# Altium PCB lab1_vodorezov_usb_rs485.PcbDoc
Units mm, origin at the board's own origin, x right, y up, seen from the top; angles counter-clockwise.
Board outline 78.05 x 34.45 mm, 4 copper layers (Top Layer, Signal Layer 1, Signal Layer 2, Bottom Layer), stack 1.522 mm thick; 31 components, 22 nets, 121 pads, 82 vias.
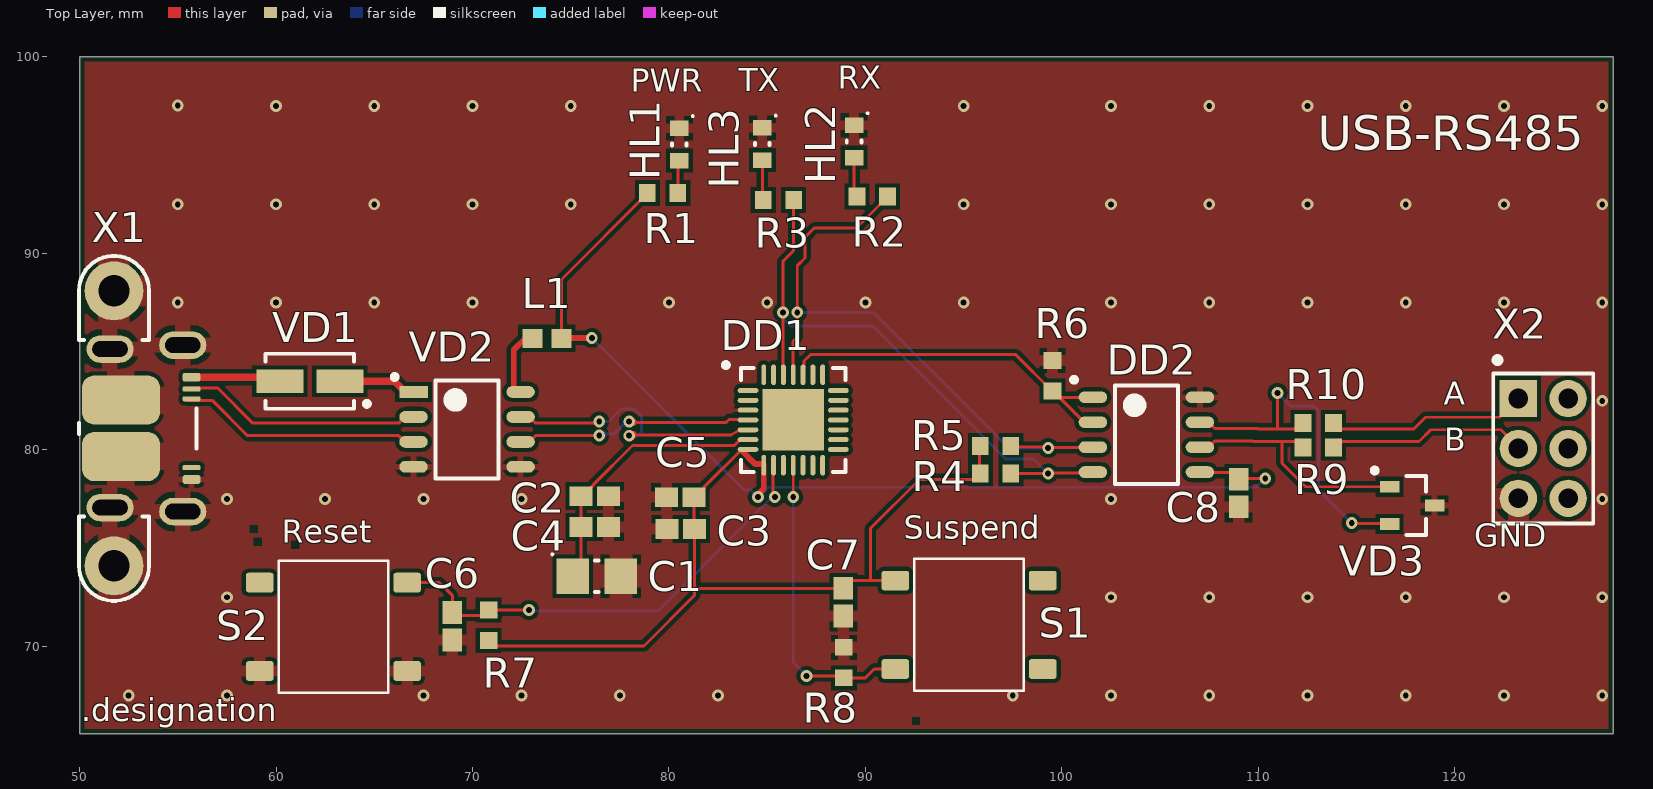
[diagram p0: Top Layer view]
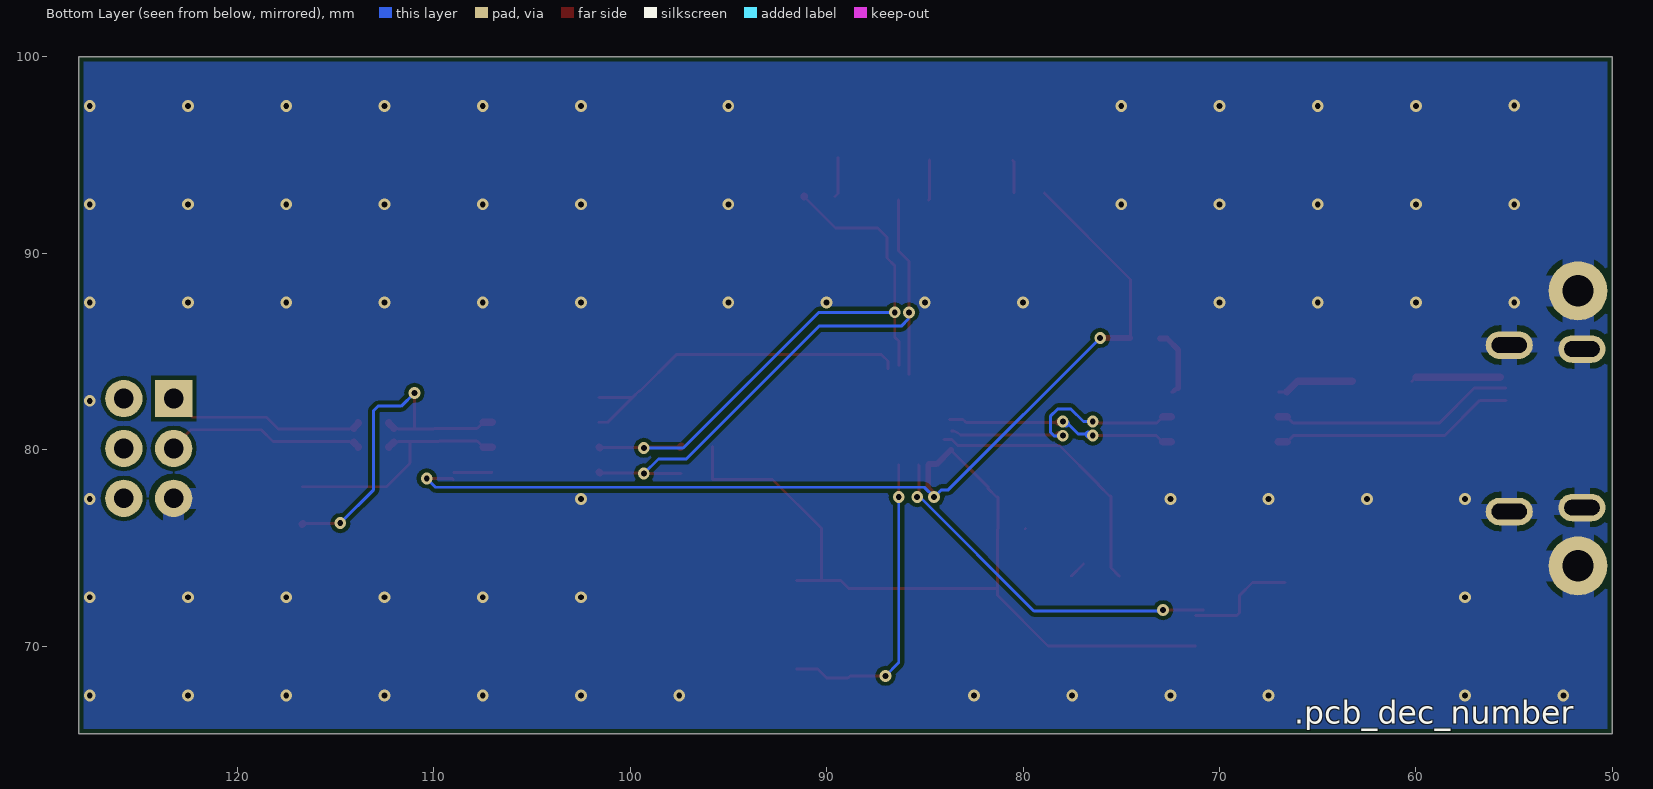
[diagram p1: Bottom Layer view, seen from below]
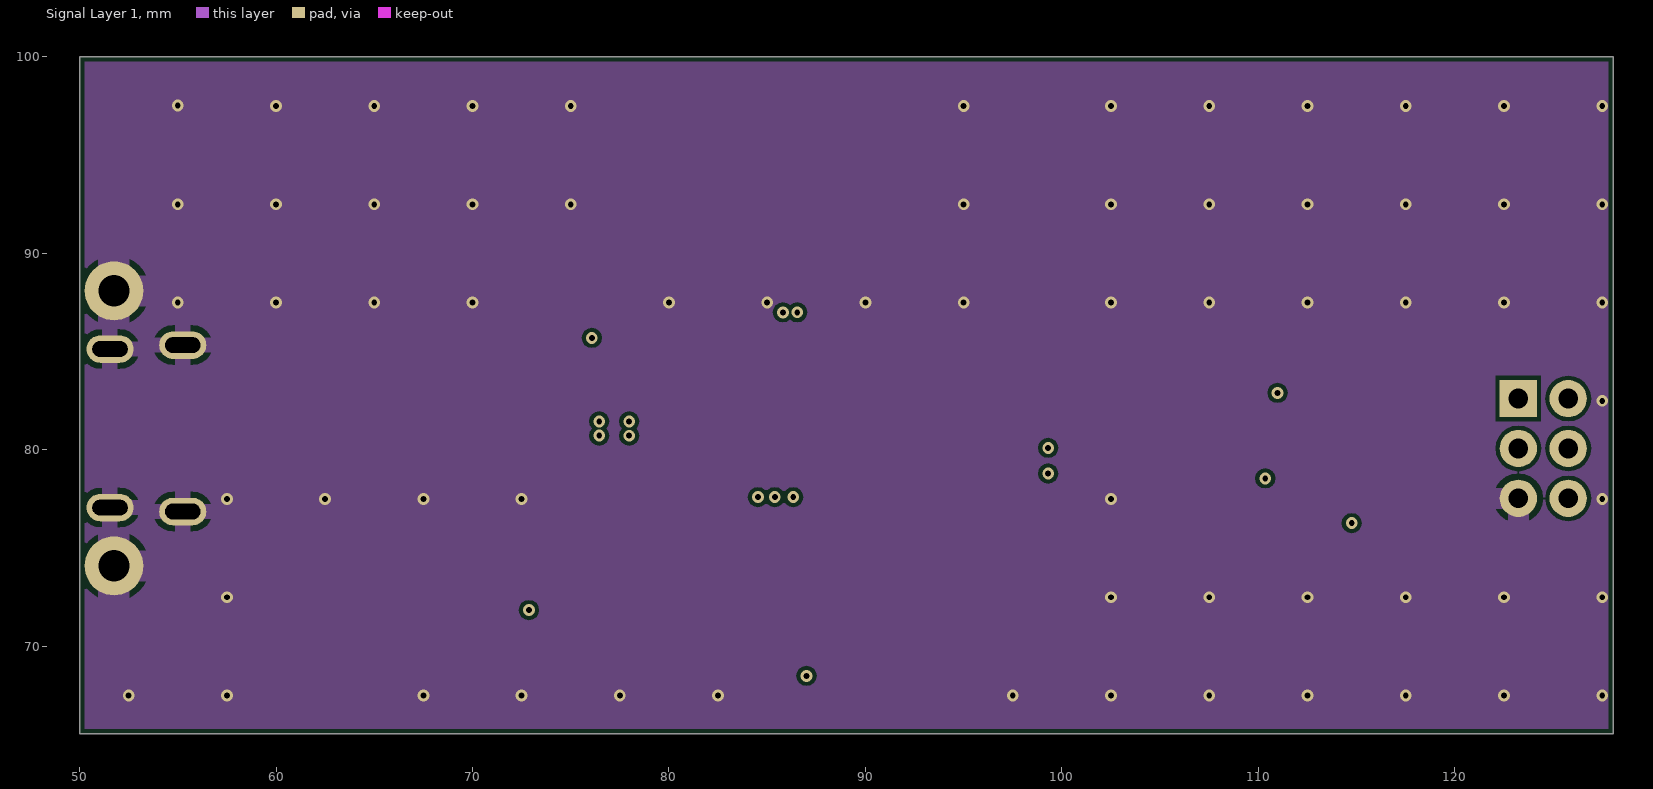
[diagram p2: Signal Layer 1]
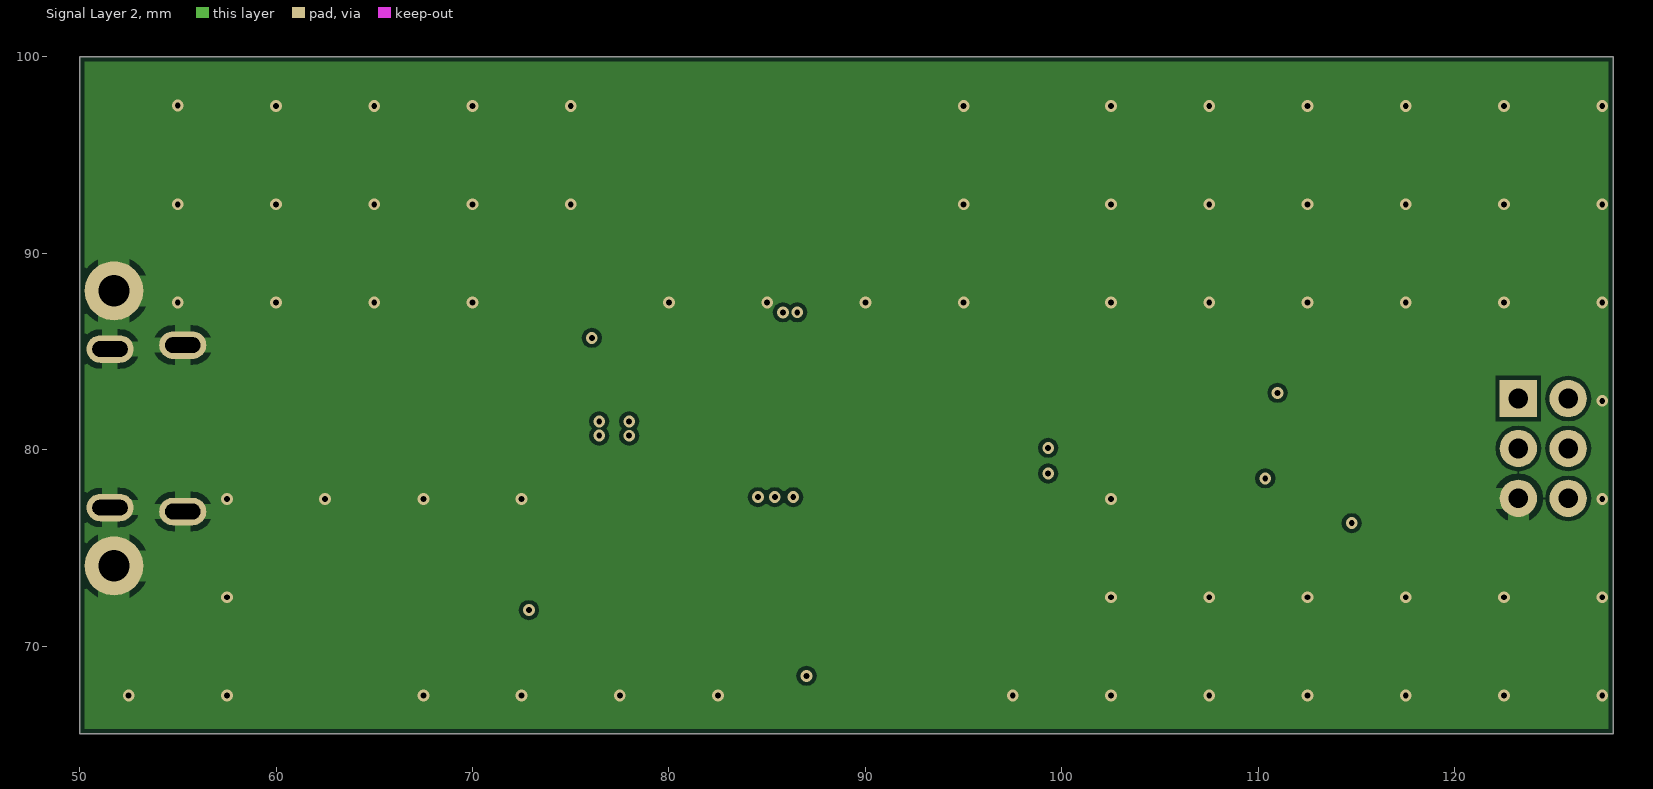
[diagram p3: Signal Layer 2]

## Layer stack, top to bottom
Top Solder: solder mask 0.0102, Solder Resist, Dk 3.5
Top Layer: signal copper 0.018
Prepreg 1: prepreg 0.125, FR4 HiTg170, Dk 5.07
Signal Layer 1: signal copper 0.018
Core 1: core 1.2, FR4, Dk 4.6
Signal Layer 2: signal copper 0.018
Prepreg 2: prepreg 0.125, FR4 HiTg170, Dk 5.07
Bottom Layer: signal copper 0.018
Bottom Solder: solder mask 0.0102, Solder Resist, Dk 3.5

## Board outline
50,65.55 128.05,65.55 128.05,100 50,100

## Design rules (kind name [scope] priority, off if disabled: settings)
AcuteAngle min_acute_angle [OnCopper] p1: minimum=3.50000000000000E+0001 checktracksonly=FALSE // Минимальный угол между примитивами топологии
BoardOutlineClearance board_outline_clearance_std [NOT (OnLayer('Bottom Overlay') OR OnLayer('Top Overlay'))] p1: gap=0.25 ignorepadtopadclearanceinfootprint=FALSE except(0: Arc-SplitContinuation Track-SplitContinuation SMDPad-SplitContinuation THPad-SplitContinuation Via-SplitContinuation Fill-SplitContinuation Poly-SplitContinuation Region-SplitContinuation Text-SplitContinuation) // Отступ элементов топологии от края фрезеруемой печатной платы
Clearance clearance_outer_18um_std [OnTopLayer OR OnBottomLayer] p1: gap=0.125 ignorepadtopadclearanceinfootprint=TRUE except(0.2: Arc-Fill Arc-Poly Track-Fill Track-Poly SMDPad-SMDPad SMDPad-Fill SMDPad-Poly THPad-Fill THPad-Poly Via-Fill Via-Poly Fill-Fill Fill-Poly Poly-Poly Poly-Region Poly-Text; 0.25: Arc-Hole Track-Hole SMDPad-Hole THPad-Hole Via-Hole Fill-Hole Poly-Hole Region-Hole Text-Hole) // Зазоры на внешних слоях
Clearance clearance_inner_18um_std [NOT (OnTopLayer Or OnBottomLayer)] p2: gap=0.125 ignorepadtopadclearanceinfootprint=FALSE except(0.2: Arc-Fill Arc-Poly Track-Fill Track-Poly SMDPad-SMDPad SMDPad-Fill SMDPad-Poly THPad-Fill THPad-Poly Via-Fill Via-Poly Fill-Fill Fill-Poly Poly-Poly Poly-Region Poly-Text; 0.25: Arc-Hole Track-Hole SMDPad-Hole THPad-Hole Via-Hole Fill-Hole Poly-Hole Region-Hole Text-Hole) // Зазоры на внутренних слоях
ComponentClearance [All] p1: gap=0 collisioncheckmode=3 verticalgap=0 showdistances=FALSE
DiffPairsRouting "Schematic Differential Pairs Routing_7" [InNet('USB_D_P')] p1: maxlimit=0.254 minlimit=0.254 mostfreqgap=0.254 toplayer_minwidth=0.381 toplayer_maxwidth=0.381 toplayer_prefwidth=0.381 midlayer1_minwidth=0.381 midlayer1_maxwidth=0.381 midlayer1_prefwidth=0.381 midlayer2_minwidth=0.381 midlayer2_maxwidth=0.381 midlayer2_prefwidth=0.381 bottomlayer_minwidth=0.381 bottomlayer_maxwidth=0.381 bottomlayer_prefwidth=0.381 maxuncoupledlength=12.7
DiffPairsRouting "Schematic Differential Pairs Routing_6" [InNet('USB_D_N')] p2: maxlimit=0.254 minlimit=0.254 mostfreqgap=0.254 toplayer_minwidth=0.381 toplayer_maxwidth=0.381 toplayer_prefwidth=0.381 midlayer1_minwidth=0.381 midlayer1_maxwidth=0.381 midlayer1_prefwidth=0.381 midlayer2_minwidth=0.381 midlayer2_maxwidth=0.381 midlayer2_prefwidth=0.381 bottomlayer_minwidth=0.381 bottomlayer_maxwidth=0.381 bottomlayer_prefwidth=0.381 maxuncoupledlength=12.7
DiffPairsRouting "Schematic Differential Pairs Routing_5" [InNet('RS485_P')] p3: maxlimit=0.254 minlimit=0.254 mostfreqgap=0.254 toplayer_minwidth=0.381 toplayer_maxwidth=0.381 toplayer_prefwidth=0.381 midlayer1_minwidth=0.381 midlayer1_maxwidth=0.381 midlayer1_prefwidth=0.381 midlayer2_minwidth=0.381 midlayer2_maxwidth=0.381 midlayer2_prefwidth=0.381 bottomlayer_minwidth=0.381 bottomlayer_maxwidth=0.381 bottomlayer_prefwidth=0.381 maxuncoupledlength=12.7
DiffPairsRouting "Schematic Differential Pairs Routing_4" [InNet('RS485_N')] p4: maxlimit=0.254 minlimit=0.254 mostfreqgap=0.254 toplayer_minwidth=0.381 toplayer_maxwidth=0.381 toplayer_prefwidth=0.381 midlayer1_minwidth=0.381 midlayer1_maxwidth=0.381 midlayer1_prefwidth=0.381 midlayer2_minwidth=0.381 midlayer2_maxwidth=0.381 midlayer2_prefwidth=0.381 bottomlayer_minwidth=0.381 bottomlayer_maxwidth=0.381 bottomlayer_prefwidth=0.381 maxuncoupledlength=12.7
DiffPairsRouting "Schematic Differential Pairs Routing_3" [InNet('CN_RS485_P')] p5: maxlimit=0.254 minlimit=0.254 mostfreqgap=0.254 toplayer_minwidth=0.381 toplayer_maxwidth=0.381 toplayer_prefwidth=0.381 midlayer1_minwidth=0.381 midlayer1_maxwidth=0.381 midlayer1_prefwidth=0.381 midlayer2_minwidth=0.381 midlayer2_maxwidth=0.381 midlayer2_prefwidth=0.381 bottomlayer_minwidth=0.381 bottomlayer_maxwidth=0.381 bottomlayer_prefwidth=0.381 maxuncoupledlength=12.7
DiffPairsRouting "Schematic Differential Pairs Routing_2" [InNet('CN_RS485_N')] p6: maxlimit=0.254 minlimit=0.254 mostfreqgap=0.254 toplayer_minwidth=0.381 toplayer_maxwidth=0.381 toplayer_prefwidth=0.381 midlayer1_minwidth=0.381 midlayer1_maxwidth=0.381 midlayer1_prefwidth=0.381 midlayer2_minwidth=0.381 midlayer2_maxwidth=0.381 midlayer2_prefwidth=0.381 bottomlayer_minwidth=0.381 bottomlayer_maxwidth=0.381 bottomlayer_prefwidth=0.381 maxuncoupledlength=12.7
DiffPairsRouting "Schematic Differential Pairs Routing_1" [InNet('CN_D_P')] p7: maxlimit=0.254 minlimit=0.254 mostfreqgap=0.254 toplayer_minwidth=0.381 toplayer_maxwidth=0.381 toplayer_prefwidth=0.381 midlayer1_minwidth=0.381 midlayer1_maxwidth=0.381 midlayer1_prefwidth=0.381 midlayer2_minwidth=0.381 midlayer2_maxwidth=0.381 midlayer2_prefwidth=0.381 bottomlayer_minwidth=0.381 bottomlayer_maxwidth=0.381 bottomlayer_prefwidth=0.381 maxuncoupledlength=12.7
DiffPairsRouting "Schematic Differential Pairs Routing" [InNet('CN_D_N')] p8: maxlimit=0.254 minlimit=0.254 mostfreqgap=0.254 toplayer_minwidth=0.381 toplayer_maxwidth=0.381 toplayer_prefwidth=0.381 midlayer1_minwidth=0.381 midlayer1_maxwidth=0.381 midlayer1_prefwidth=0.381 midlayer2_minwidth=0.381 midlayer2_maxwidth=0.381 midlayer2_prefwidth=0.381 bottomlayer_minwidth=0.381 bottomlayer_maxwidth=0.381 bottomlayer_prefwidth=0.381 maxuncoupledlength=12.7
DiffPairsRouting diff_pairs_routing [All] p9: maxlimit=0.254 minlimit=0.127 mostfreqgap=0.254 toplayer_maxgap=0.127 toplayer_prefgap=0.127 toplayer_minwidth=0.143 toplayer_maxwidth=0.143 toplayer_prefwidth=0.143 midlayer1_minwidth=0.381 midlayer1_maxwidth=0.381 midlayer1_prefwidth=0.381 midlayer2_minwidth=0.381 midlayer2_maxwidth=0.381 midlayer2_prefwidth=0.381 bottomlayer_maxgap=0.127 bottomlayer_prefgap=0.127 bottomlayer_minwidth=0.143 bottomlayer_maxwidth=0.143 bottomlayer_prefwidth=0.143 impedanceprofiledriven=TRUE maxuncoupledlength=12.7 // Правила трассировки дифференциальных пар
HoleSize min_hole_size_std [IsPad] p1: absolutevalues=TRUE maxlimit=5.9 minlimit=0.6 maxpercent=80.000 minpercent=20.000 // Диаметр межслойного переходного отверстия
HoleSize min_hole_size_via_std [IsVia] p2: absolutevalues=TRUE maxlimit=5.9 minlimit=0.3 maxpercent=80.000 minpercent=20.000 // Минимальный диаметр монтажного отверстия
HoleToHoleClearance hole_to_hole_clearance_std [All] p1: gap=0.2 allowstackedmicrovias=FALSE // Минимальное расстояние между краями двух отверстий
MinimumAnnularRing min_via_ar_std [All] p1: minimumring=0.15 // Поясок площадки переходного отверстия (Annular ring VIA)
MinimumAnnularRing min_pad_ar_std [All] p2: minimumring=0.2 // Поясок монтажной контактной площадки (Annular ring PAD)
MinimumSolderMaskSliver min_solder_mask_bridge_std [All] p1: minsoldermaskwidth=0.15 // Мнимальная ширина масочного мостика
PlaneClearance plane_clearance_18um_std [All] p1: clearance=0.2 // Отступ полигона (для слоя plane) от элементов топологии
PlaneConnect [All] p1: planeconnectstyle=Relief reliefexpansion=0.5 reliefentries=4 reliefconductorwidth=0.2 reliefairgap=0.2
PolygonConnect poly_connect_to_pad<=0.3 [(AsMM(PadXSize_AllLayers)<=0.301) or (AsMM(PadYSize_AllLayers)<=0.301)] p1: thpad.connectstyle=Relief thpad.reliefconductorwidth=0.2 thpad.reliefentries=4 thpad.polygonreliefangle="90 Angle" thpad.airgapwidth=0.2 smdpad.connectstyle=Relief smdpad.reliefconductorwidth=0.2 smdpad.reliefentries=4 smdpad.polygonreliefangle="90 Angle" smdpad.airgapwidth=0.2 via.connectstyle=Direct via.reliefconductorwidth=0.254 via.reliefentries=4 via.polygonreliefangle="90 Angle" via.airgapwidth=0.254 // Правила подключения полигонов для падов от 0,3мм и меньше
PolygonConnect poly_connect_to_pad<=0.4 [(AsMM(PadXSize_AllLayers)<=0.401) or (AsMM(PadYSize_AllLayers)<=0.401)] p2: thpad.connectstyle=Relief thpad.reliefconductorwidth=0.26 thpad.reliefentries=4 thpad.polygonreliefangle="90 Angle" thpad.airgapwidth=0.2 smdpad.connectstyle=Relief smdpad.reliefconductorwidth=0.26 smdpad.reliefentries=4 smdpad.polygonreliefangle="90 Angle" smdpad.airgapwidth=0.2 via.connectstyle=Direct via.reliefconductorwidth=0.254 via.reliefentries=4 via.polygonreliefangle="90 Angle" via.airgapwidth=0.254 // Правила подключения полигонов для падов от 0,4 и меньше
PolygonConnect poly_connect_to_pad<=0.6 [(AsMM(PadXSize_AllLayers)<=0.601) or (AsMM(PadYSize_AllLayers)<=0.601)] p3: thpad.connectstyle=Relief thpad.reliefconductorwidth=0.33 thpad.reliefentries=4 thpad.polygonreliefangle="90 Angle" thpad.airgapwidth=0.2 smdpad.connectstyle=Relief smdpad.reliefconductorwidth=0.33 smdpad.reliefentries=4 smdpad.polygonreliefangle="90 Angle" smdpad.airgapwidth=0.2 via.connectstyle=Direct via.reliefconductorwidth=0.254 via.reliefentries=4 via.polygonreliefangle="90 Angle" via.airgapwidth=0.254 // Правила подключения полигонов для падов от 0,6мм и меньше
PolygonConnect poly_connect_to_pad<=0.7 [(AsMM(PadXSize_AllLayers)<=0.701) or (AsMM(PadYSize_AllLayers)<=0.701)] p4: thpad.connectstyle=Relief thpad.reliefconductorwidth=0.46 thpad.reliefentries=4 thpad.polygonreliefangle="90 Angle" thpad.airgapwidth=0.2 smdpad.connectstyle=Relief smdpad.reliefconductorwidth=0.46 smdpad.reliefentries=4 smdpad.polygonreliefangle="90 Angle" smdpad.airgapwidth=0.2 via.connectstyle=Direct via.reliefconductorwidth=0.254 via.reliefentries=4 via.polygonreliefangle="90 Angle" via.airgapwidth=0.254 // Правила подключения полигонов для падов от 0,7мм и меньше
PolygonConnect poly_connect_to_pad<=0.8 [(AsMM(PadXSize_AllLayers)<=0.8)or(AsMM(PadYSize_AllLayers)<=0.8)] p5: thpad.connectstyle=Relief thpad.reliefconductorwidth=0.53 thpad.reliefentries=4 thpad.polygonreliefangle="90 Angle" thpad.airgapwidth=0.3 smdpad.connectstyle=Relief smdpad.reliefconductorwidth=0.53 smdpad.reliefentries=4 smdpad.polygonreliefangle="90 Angle" smdpad.airgapwidth=0.2 via.connectstyle=Direct via.reliefconductorwidth=0.254 via.reliefentries=4 via.polygonreliefangle="90 Angle" via.airgapwidth=0.254 // Правила подключения полигонов для падов от 0,8мм и меньше
PolygonConnect poly_connect_to_pad<=1 [(AsMM(PadXSize_AllLayers)<=1.01)or(AsMM(PadYSize_AllLayers)<=1.01)] p6: thpad.connectstyle=Relief thpad.reliefconductorwidth=0.6 thpad.reliefentries=4 thpad.polygonreliefangle="90 Angle" thpad.airgapwidth=0.3 smdpad.connectstyle=Relief smdpad.reliefconductorwidth=0.6 smdpad.reliefentries=4 smdpad.polygonreliefangle="90 Angle" smdpad.airgapwidth=0.2 via.connectstyle=Direct via.reliefconductorwidth=0.254 via.reliefentries=4 via.polygonreliefangle="90 Angle" via.airgapwidth=0.254 // Правила подключения полигонов для падов от 1мм и меньше
PolygonConnect poly_connect_to_pad<=1.3 [(AsMM(PadXSize_AllLayers)<=1.31)or(AsMM(PadYSize_AllLayers)<=1.31)] p7: thpad.connectstyle=Relief thpad.reliefconductorwidth=0.66 thpad.reliefentries=4 thpad.polygonreliefangle="90 Angle" thpad.airgapwidth=0.3 smdpad.connectstyle=Relief smdpad.reliefconductorwidth=0.86 smdpad.reliefentries=4 smdpad.polygonreliefangle="90 Angle" smdpad.airgapwidth=0.2 via.connectstyle=Direct via.reliefconductorwidth=0.254 via.reliefentries=4 via.polygonreliefangle="90 Angle" via.airgapwidth=0.254 // Правила подключения полигонов для падов от 1,3мм и меньше
PolygonConnect poly_connect_to_pad<=1.6 [(AsMM(PadXSize_AllLayers)<=1.61)or(AsMM(PadYSize_AllLayers)<=1.61)] p8: thpad.connectstyle=Relief thpad.reliefconductorwidth=0.8 thpad.reliefentries=4 thpad.polygonreliefangle="90 Angle" thpad.airgapwidth=0.3 smdpad.connectstyle=Relief smdpad.reliefconductorwidth=1 smdpad.reliefentries=4 smdpad.polygonreliefangle="90 Angle" smdpad.airgapwidth=0.2 via.connectstyle=Direct via.reliefconductorwidth=0.254 via.reliefentries=4 via.polygonreliefangle="90 Angle" via.airgapwidth=0.254 // Правила подключения полигонов для падов от 1,6мм и меньше
PolygonConnect poly_connect_to_pad<=1.8 [(AsMM(PadXSize_AllLayers)<=1.8)or(AsMM(PadYSize_AllLayers)<=1.8)] p9: thpad.connectstyle=Relief thpad.reliefconductorwidth=1 thpad.reliefentries=4 thpad.polygonreliefangle="90 Angle" thpad.airgapwidth=0.3 smdpad.connectstyle=Relief smdpad.reliefconductorwidth=1.2 smdpad.reliefentries=4 smdpad.polygonreliefangle="90 Angle" smdpad.airgapwidth=0.2 via.connectstyle=Direct via.reliefconductorwidth=0.254 via.reliefentries=4 via.polygonreliefangle="90 Angle" via.airgapwidth=0.254 // Правила подключения полигонов для падов от 1,8мм и меньше
PolygonConnect poly_connect_to_pad<=2 [(AsMM(PadXSize_AllLayers)<=2.01)or(AsMM(PadYSize_AllLayers)<=2.01)] p10: thpad.connectstyle=Relief thpad.reliefconductorwidth=1.1 thpad.reliefentries=4 thpad.polygonreliefangle="90 Angle" thpad.airgapwidth=0.3 smdpad.connectstyle=Relief smdpad.reliefconductorwidth=1.4 smdpad.reliefentries=4 smdpad.polygonreliefangle="90 Angle" smdpad.airgapwidth=0.2 via.connectstyle=Direct via.reliefconductorwidth=0.254 via.reliefentries=4 via.polygonreliefangle="90 Angle" via.airgapwidth=0.254 // Правила подключения полигонов для падов от 2мм и меньше
PolygonConnect poly_connect_to_pad<=2.3 [(AsMM(PadXSize_AllLayers)<=2.31)or(AsMM(PadYSize_AllLayers)<=2.31)] p11: thpad.connectstyle=Relief thpad.reliefconductorwidth=1.2 thpad.reliefentries=4 thpad.polygonreliefangle="90 Angle" thpad.airgapwidth=0.3 smdpad.connectstyle=Relief smdpad.reliefconductorwidth=1.4 smdpad.reliefentries=4 smdpad.polygonreliefangle="90 Angle" smdpad.airgapwidth=0.2 via.connectstyle=Direct via.reliefconductorwidth=0.254 via.reliefentries=4 via.polygonreliefangle="90 Angle" via.airgapwidth=0.254 // Правила подключения полигонов для падов от 2,3мм и меньше
PolygonConnect poly_connect_to_pad<=2.5 [(AsMM(PadXSize_AllLayers)<=2.51)or(AsMM(PadYSize_AllLayers)<=2.51)] p12: thpad.connectstyle=Relief thpad.reliefconductorwidth=1.2 thpad.reliefentries=4 thpad.polygonreliefangle="90 Angle" thpad.airgapwidth=0.3 smdpad.connectstyle=Relief smdpad.reliefconductorwidth=1.4 smdpad.reliefentries=4 smdpad.polygonreliefangle="90 Angle" smdpad.airgapwidth=0.2 via.connectstyle=Direct via.reliefconductorwidth=0.254 via.reliefentries=4 via.polygonreliefangle="90 Angle" via.airgapwidth=0.254 // Правила подключения полигонов для падов от 2,5мм и меньше
PolygonConnect poly_connect_to_pad<=2.7 [(AsMM(PadXSize_AllLayers)<=2.71)or(AsMM(PadYSize_AllLayers)<=2.71)] p13: thpad.connectstyle=Relief thpad.reliefconductorwidth=1.4 thpad.reliefentries=4 thpad.polygonreliefangle="90 Angle" thpad.airgapwidth=0.3 smdpad.connectstyle=Relief smdpad.reliefconductorwidth=1.6 smdpad.reliefentries=4 smdpad.polygonreliefangle="90 Angle" smdpad.airgapwidth=0.2 via.connectstyle=Direct via.reliefconductorwidth=0.254 via.reliefentries=4 via.polygonreliefangle="90 Angle" via.airgapwidth=0.254 // Правила подключения полигонов для падов от 2,7мм и меньше
PolygonConnect poly_connect_to_pad<=3 [(AsMM(PadXSize_AllLayers)<=3.01)or(AsMM(PadYSize_AllLayers)<=3.01)] p14: thpad.connectstyle=Relief thpad.reliefconductorwidth=1.6 thpad.reliefentries=4 thpad.polygonreliefangle="90 Angle" thpad.airgapwidth=0.3 smdpad.connectstyle=Relief smdpad.reliefconductorwidth=1.8 smdpad.reliefentries=4 smdpad.polygonreliefangle="90 Angle" smdpad.airgapwidth=0.2 via.connectstyle=Direct via.reliefconductorwidth=0.254 via.reliefentries=4 via.polygonreliefangle="90 Angle" via.airgapwidth=0.254 // Правила подключения полигонов для падов от 3мм и меньше
PolygonConnect poly_connect_to_pad<=7 [(AsMM(PadXSize_AllLayers)<7.01)or(AsMM(PadYSize_AllLayers)<=7.01)] p15: thpad.connectstyle=Relief thpad.reliefconductorwidth=2 thpad.reliefentries=4 thpad.polygonreliefangle="90 Angle" thpad.airgapwidth=0.4 smdpad.connectstyle=Relief smdpad.reliefconductorwidth=2 smdpad.reliefentries=4 smdpad.polygonreliefangle="90 Angle" smdpad.airgapwidth=0.3 via.connectstyle=Direct via.reliefconductorwidth=0.254 via.reliefentries=4 via.polygonreliefangle="90 Angle" via.airgapwidth=0.254 // Правила подключения полигонов для падов от 7мм и меньше
PolygonConnect poly_connect_to_pad [All] p16: thpad.connectstyle=Relief thpad.reliefconductorwidth=0.25 thpad.reliefentries=4 thpad.polygonreliefangle="90 Angle" thpad.airgapwidth=0.2 smdpad.connectstyle=Relief smdpad.reliefconductorwidth=0.25 smdpad.reliefentries=4 smdpad.polygonreliefangle="90 Angle" smdpad.airgapwidth=0.2 via.connectstyle=Direct via.reliefconductorwidth=0.25 via.reliefentries=4 via.polygonreliefangle="90 Angle" via.airgapwidth=0.2 // Правила подключения полигонов общие
RoomDefinition lab1_vodorezov_usb_rs485 [InComponentClass('lab1_vodorezov_usb_rs485')] p1: confinementstyle=ConfineIn formatcopy=TRUE lockcomponents=FALSE outline 0,0 50.8,0 50.8,25.4 0,25.4
RoutingCorners [All] p1 off: cornerstyle=45-Degree minsetback=2.5 maxsetback=2.5
RoutingVias [All] p1: holewidth=0.3 width=0.6 viastyle="Through Hole" minholewidth=0.3 minwidth=0.6 maxholewidth=5.9 maxwidth=6.4
SilkToSilkClearance silk_to_silk_clearance_std [All] p1 off: silktosilkclearance=0.15 // Отступ текста шелкографии от других примитивов шелкографии
SilkToSolderMaskClearance silk_to_solder_mask_clearance_std [IsPad] p1 off: minsilkscreentomaskgap=0.15 clearancetoexposedcopper=FALSE // Минимальное расстояние между элементами шелкографии и вскрытой медью
SolderMaskExpansion solder_mask_expansion_std [All] p1: expansion=0.05 // Припуск паяльной масски
UnRoutedNet [All] p1: checkbadconnections=TRUE
Width width_18um_std [All] p1: maxlimit=10 minlimit=0.125 preferedwidth=0.15 checkconnectedcopper=TRUE // Ширина проводников (общая)
19 further rules are at their usual default settings.

## Classes and differential pairs
differential pair class DIFF_PAIRS: CN_D CN_RS485 RS485 USB_D
differential pair USB_D: +USB_D_P -USB_D_N
differential pair RS485: +RS485_P -RS485_N
differential pair CN_RS485: +CN_RS485_P -CN_RS485_N
differential pair CN_D: +CN_D_P -CN_D_N

## Components (designator, comment, footprint, x,y, rotation, side; value= is the part's Value field where it differs from the comment)
C1 "4,7 мк" C1206POLAR 76.325,73.575 r0 top
C2 "1 мк" C0603 76.225,77.65 r0 top
C3 "1 мк" C0603 80.6,75.975 r180 top
C4 "0,1 мк" C0603 76.225,76.075 r180 top
C5 "0,1 мк" C0603 80.575,77.6 r0 top
C6 "0,1 мк" C0603 68.975,71.025 r270 top
C7 "0,1 мк" C0603 88.875,72.25 r90 top
C8 "0,1 мк" C0603 109,77.8 r270 top
DD1 "CP2102-GM" QFN-28 86.325,81.525 r0 top
DD2 "MAX485ESA" SOIC-8 104.3,80.775 r0 top
HL1 "TLMY1000-GS08" HL0603 80.525,95.55 r270 top
HL2 "TLMG1100-GS08" HL0603 89.425,95.7 r270 top
HL3 "TLMS1000-GS08" HL0603 84.75,95.575 r270 top
L1 "BLM18KG221SH1D" BLM-2-0603 73.785,85.675 r0 top
R1 "220" R0603 79.675,93.075 r180 top
R2 "220" R0603 90.35,92.9 r180 top
R3 "220" R0603 85.575,92.725 r180 top
R4 "10 к" R0603 96.625,78.8 r180 top
R5 "10 к" R0603 96.625,80.2 r180 top
R6 "10 к" R0603 99.525,83.775 r270 top
R7 "4,7 к" R0603 70.825,71.075 r270 top
R8 "10 к" R0603 88.9,69.175 r270 top
R9 "100" R0603 113.05,80.125 r0 top
R10 "100" R0603 113.05,81.375 r0 top
S1 "KLS7-TS6604-5.0-180-B" KLS7-TS6604-5.0-180-B 95.275,71.1 r180 top
S2 "KLS7-TS6604-5.0-180-B" KLS7-TS6604-5.0-180-B 62.925,71 r0 top
VD1 "SL13-E3/5AT" DO-214AC 61.725,83.495 r180 top
VD2 "USB6B1" SO-8 69.725,81.045 r0 top
VD3 "SM712-02HTG" SOT23-3 117.825,77.175 r0 top
X1 "2108877-1" 2108877-1 52.004,81.1 r90 top
X2 "DS1021-2*3SF11" DS1021-2X3SF11 124.5,80.075 r270 top

## Footprints (in the part's own frame and the unit in brackets; to place one, negate y for a bottom-side part, rotate by r counter-clockwise, add the part's x,y. Pads: shape width x height; smd on the part's side, far side on the other; paste and mask are expansions set on the pad)
2108877-1 [mm] "Micro USB-B, Flanged"
  rrect50% 0.45x0.9 smd: 1(2.6,-3.696) 5(-2.6,-3.696)
  rrect50% 0.25x0.9 smd: 2(2,-3.696) 3(1.5,-3.696) 4(-2,-3.696)
  round 3 hole 1.6: TP1(-7,0.25) TP1(7,0.25)
  oval 1.4x2.4 hole 0.8 slot 1.8 at 90 deg mask+0.102: TP1(-4.235,-3.25) TP1(-4.035,0.45) TP1(4.035,0.45) TP1(4.235,-3.25)
  rrect50% 2.5x3.98 smd: TP1(-1.441,-0.104) TP1(1.441,-0.104)
  silkscreen extent -8.78,-3.95 8.78,2.03, body extent -8.9,-3.95 8.9,3.95, height 3.39
BLM-2-0603 [mm] "Chip Inductor, 2-Leads, Body 1,60x0,80mm, IPC Medium Density"
  rect 1.02x0.98 smd: 1(-0.74,0) 2(0.74,0)
  body extent -0.88,-0.48 0.87,0.47, height 0.95
C0603 [mm] "Chip Capacitor, 2-Leads, Body 1,60x0,80mm, IPC Medium Density"
  rect 1.15x1 smd: 1(-0.7,0) 2(0.7,0)
  body extent -0.88,-0.48 0.87,0.47, height 0.95
C1206POLAR [mm] "Chip Capacitor, 2-Leads, Body 3,20x1,60mm, IPC Medium Density"
  rect 1.65x1.8 smd: 1(-1.225,0) 2(1.225,0)
  silkscreen extent -2.31,-0.8 0.1,1.16, body extent -1.7,-0.9 1.7,0.9, height 1.8
DO-214AC [mm] "Molded Diode, 2-Leads, Body 4,25x2,67mm, IPC Medium Density"
  rect 2.4x1.2 smd: 1(-1.525,0) 2(1.525,0)
  silkscreen extent -3.03,-1.4 2.25,1.4, body extent -2.25,-1.4 2.25,1.39, height 2.29
DS1021-2X3SF11 [mm]
  rect 1.9x1.9 hole 1: 1(-2.54,-1.27)
  round 1.9 hole 1: 2(-2.54,1.27) 3(0,-1.27)
  round 1.9 hole 1 mask+0.102: 4(0,1.27) 5(2.54,-1.27) 6(2.54,1.27)
  silkscreen extent -4.5,-2.55 3.81,2.54, body extent -3.81,-2.54 3.81,2.54, height 8.59
HL0603 [mm] "Chip Diode, 2-Leads, Body 1,60x0,80mm, IPC Medium Density"
  rect 0.8x0.95 smd: 1(-0.825,0) 2(0.825,0)
  silkscreen extent -1.49,-0.38 0.05,0.74, body extent -0.85,-0.45 0.85,0.45, height 0.65
KLS7-TS6604-5.0-180-B [mm]
  rrect25% 1.4x1 smd: 1(-3.75,2.25) 1(3.75,2.25) 2(-3.75,-2.25) 2(3.75,-2.25)
  silkscreen extent -2.79,-3.35 2.79,3.35, body extent -4,-3.25 4,3.25, height 4.3
QFN-28 [mm] "QFN, 28-Leads, Body 5,00x5,00mm, Pitch 0,50mm, Thermal Pad 3,13x3,13mm, IPC Medium Density"
  oval 1.05x0.25 smd: 1(-2.3,1.5) 2(-2.3,1) 3(-2.3,0.5) 4(-2.3,0) 5(-2.3,-0.5) 6(-2.3,-1) 7(-2.3,-1.5) 15(2.3,-1.5) 16(2.3,-1) 17(2.3,-0.5) 18(2.3,0) 19(2.3,0.5) 20(2.3,1) 21(2.3,1.5)
  oval 0.25x1.05 smd: 8(-1.5,-2.3) 9(-1,-2.3) 10(-0.5,-2.3) 11(0,-2.3) 12(0.5,-2.3) 13(1,-2.3) 14(1.5,-2.3) 22(1.5,2.3) 23(1,2.3) 24(0.5,2.3) 25(0,2.3) 26(-0.5,2.3) 27(-1,2.3) 28(-1.5,2.3)
  rect 3.13x3.13 smd: 29(0,0)
  silkscreen extent -3.55,-2.65 2.65,2.92, body extent -2.5,-2.5 2.5,2.5, height 1
R0603 [mm] "Chip Resistor, 2-Leads, Body 1,60x0,80mm, IPC Medium Density"
  rect 0.85x0.9 smd: 1(-0.775,0) 2(0.775,0)
  body extent -0.85,-0.45 0.85,0.45, height 0.55
SO-8 [mm] "SOIC, 8-Leads, Body 4,90x3,90mm, Pitch 1,27mm, IPC Medium Density"
  rect 1.45x0.6 smd: 1(-2.725,1.905)
  oval 1.45x0.6 smd: 2(-2.725,0.635) 3(-2.725,-0.635) 4(-2.725,-1.905) 5(2.725,-1.905) 6(2.725,-0.635) 7(2.725,0.635) 8(2.725,1.905)
  silkscreen extent -3.81,-2.5 1.6,2.79, body extent -2,-2.5 2,2.5, height 1.75
SOIC-8 [mm] "SOIC, 8-Leads, Body 4,90x3,90mm, Pitch 1,27mm, IPC Medium Density"
  oval 1.45x0.6 smd: 1(-2.725,1.905) 2(-2.725,0.635) 3(-2.725,-0.635) 4(-2.725,-1.905) 5(2.725,-1.905) 6(2.725,-0.635) 7(2.725,0.635) 8(2.725,1.905)
  silkscreen extent -3.81,-2.5 1.6,2.92, body extent -2,-2.5 2,2.5, height 1.75
SOT23-3 [mm] "SOT23, 3-Leads, Body 2,92x2,37mm"
  rect 1x0.6 smd: 1(-1.145,0.95) 2(-1.145,-0.95) 3(1.145,0)
  silkscreen extent -2.03,-1.5 0.7,1.9, body extent -0.7,-1.52 0.7,1.52, height 1.12

## Part data
C1: library part c0009, "=????????", HelpURL=https://www.vishay.com/capacitors/list/product-40002/, ID=c0009, ??????=1206, ????????????=293D105X9025A2TE3, ???????="4,7 ??", ??????????? ??????????="25 ?", ????????="??????????? ??? 1206 4,7 ??? 25 ? ±10 % ????????", ??????????="±10 %", ?????????????="Vishay Intertechnology, Inc.", ??????? ???????????="?? -55 °? ?? +125 °?", ???????=?????????
C2 C3: library part c0004, "=????????", HelpURL=https://www.yageo.com/upload/media/product/products/datasheet/mlcc/UPY-GPHC_X7R_6.3V-to-50V_20.pdf, ID=c0004, ??????=0603, ????????????=CC0603KRX7R8BB105, ???????="1 ??", ??????????? ??????????="25 ?", ????????="??????????? ??? 0603 1 ??? 25 ? ±10 %", ??????????="±10 %", ?????????????=Yageo, ??????? ???????????="?? -55 °? ?? +125 °?", ???????=????????
C4 C5 C6 C7 C8: library part c0002, "=????????", HelpURL=https://www.yageo.com/upload/media/product/products/datasheet/mlcc/UPY-GPHC_X7R_6.3V-to-50V_20.pdf, ID=c0002, ??????=0603, ????????????=CC0603JRX7R9BB104, ???????="0,1 ??", ??????????? ??????????="50 ?", ????????="??????????? ??? 0603 0,1 ??? 50 ? ±5 %", ??????????="±5 %", ?????????????=Yageo, ??????? ???????????="?? -55 °? ?? +125 °?", ???????=????????
DD1: library part dd0008, "=????????", HelpURL=https://www.silabs.com/interface/usb-bridges/classic/device.cp2102, ID=dd0008, ??????=QFN-28, ????????????=CP2102-GM, ????????="??????????????? USB-UART", ?????????????="Silicon Laboratories Inc.", ???????=?????????
DD2: library part dd0009, "=????????", HelpURL=https://www.maximintegrated.com/en/products/interface/transceivers/MAX485.html, ID=dd0009, ??????=SOIC-8, ????????????=MAX485ESA, ????????="?????????? RS-485/RS-422", ?????????????="Maxim Integrated Products", ???????=?????????
HL1: library part hl0003, "=????????", HelpURL=https://www.vishay.com/leds/list/product-83172/, ID=hl0003, ??????=0603, ????????????=TLMY1000-GS08, ??????????? ????? ?????="588 ??", ??????????? ???? ?????="7,5 ???", ??????????? ??????? ??????????="1,8 ?", ??????????? ?????? ???="15 ??", ????????="????????? ??? 0603 ??????", ?????????????="Vishay Intertechnology, Inc.", ??????? ???????????="?? -40 °? ?? +100 °?", ???????????? ????????="40 ???", ???????=????????, ????=Yellow
HL2: library part hl0005, "=????????", HelpURL=https://www.vishay.com/leds/list/product-83173/, ID=hl0005, ??????=0603, ????????????=TLMG1100-GS08, ??????????? ????? ?????="570 ??", ??????????? ???? ?????="35 ???", ??????????? ??????? ??????????="2,1 ?", ??????????? ?????? ???="30 ??", ????????="????????? ??? 0603 ???????", ?????????????="Vishay Intertechnology, Inc.", ??????? ???????????="?? -40 °? ?? +100 °?", ???????????? ????????="90 ???", ???????=????????, ????=Green
HL3: library part hl0001, "=????????", HelpURL=https://www.vishay.com/leds/list/product-83172/, ID=hl0001, ??????=0603, ????????????=TLMS1000-GS08, ??????????? ????? ?????="628 ??", ??????????? ???? ?????="4 ???", ??????????? ??????? ??????????="1,8 ?", ??????????? ?????? ???="15 ??", ????????="????????? ??? 0603 ???????", ?????????????="Vishay Intertechnology, Inc.", ??????? ???????????="?? -40 °? ?? +100 °?", ???????????? ????????="40 ???", ???????=????????, ????=Red
L1: library part l0001, "=????????", HelpURL=https://www.murata.com/en-global/products/productdetail.aspx?partno=BLM18KG221SH1%23, ID=l0001, ??????=0603, ????????????=BLM18KG221SH1D, ????????="?????????? ?????? 220 ?? ±25 %", ??????????, 100 ???="±25 %", ?????????????="Murata Manufacturing Co., Ltd.", ??????? ???????????="?? -55 °? ?? +125 °?", ?????????????, 100 ???="220 ??", ????????????? ??? ?????????? ????="0,05 ??", ???????=????????
R1 R2 R3: library part r0005, "=????????", HelpURL=https://www.yageo.com/upload/media/product/productsearch/datasheet/rchip/PYu-RC_Group_51_RoHS_L_11.pdf, ID=r0005, ??????=0603, ????????????=RC0603FR-07220RL, ???????=220, ??????????? ??????????="75 ?", ??????????? ???="1 ?", ????????="???????? ??? 0603 220 ?? ±1 % 0,1 ??", ??????????="±1 %", ?????????????=Yageo, ??????? ???????????="?? -55 °? ?? +155 °?", ???????=????????
R4 R5 R6 R8: library part r0008, "=????????", HelpURL=https://www.yageo.com/upload/media/product/productsearch/datasheet/rchip/PYu-RC_Group_51_RoHS_L_11.pdf, ID=r0008, ??????=0603, ????????????=RC0603FR-0710KL, ???????="10 ?", ??????????? ??????????="75 ?", ??????????? ???="1 ?", ????????="???????? ??? 0603 10 ??? ±1 % 0,1 ??", ??????????="±1 %", ?????????????=Yageo, ??????? ???????????="?? -55 °? ?? +155 °?", ???????=???????
R7: library part r0007, "=????????", HelpURL=https://www.yageo.com/upload/media/product/productsearch/datasheet/rchip/PYu-RC_Group_51_RoHS_L_11.pdf, ID=r0007, ??????=0603, ????????????=RC0603FR-074K7L, ???????="4,7 ?", ??????????? ??????????="75 ?", ??????????? ???="1 ?", ????????="???????? ??? 0603 4,7 ??? ±1 % 0,1 ??", ??????????="±1 %", ?????????????=Yageo, ??????? ???????????="?? -55 °? ?? +155 °?", ???????=????????
R9 R10: library part r0004, "=????????", HelpURL=https://www.yageo.com/upload/media/product/productsearch/datasheet/rchip/PYu-RC_Group_51_RoHS_L_11.pdf, ID=r0004, ??????=0603, ????????????=RC0603FR?-07100RL, ???????=100, ??????????? ??????????="75 ?", ??????????? ???="1 ?", ????????="???????? ??? 0603 100 ?? ±1 % 0,1 ??", ??????????="±1 %", ?????????????=Yageo, ??????? ???????????="?? -55 °? ?? +155 °?", ???????=???????
VD1: library part vd0001, "=????????", HelpURL=https://www.vishay.com/product?docid=88740, ID=vd0001, ?????????? ???????? ??????????="30 ?", ??????=DO-214AC, ????# ?????????? ??????? ?????? ???="1,5 ?", ????????????=SL13-E3/5AT, ????????="???? ?????? 30 ? 1,5 ?", ??????? ?????? ??????????="0,445 ?", ?????????????="Vishay Intertechnology, Inc.", ??????? ???????????="?? -55 °? ?? +125 °?", ???????=????????
VD2: library part vd0005, "=????????", HelpURL=https://www.st.com/content/st_com/en/products/protection-devices/esd-protection/usb-port-protection/usb6b1.html, ID=vd0005, ??????=SO-8, ????????????=USB6B1, ????????="??????? ?????? ??? ?????????? ?????, ?? 6 ?", ?????????????=STMicroelectronics, ???????=????????
VD3: library part vd0003, "=????????", HelpURL=https://www.littelfuse.com/products/tvs-diode-arrays/general-purpose-esd-protection/sm712.aspx, ID=vd0003, ??????=SOT23-3, ????????????=SM712-02HTG, ????????="??????? ?????? ??? ?????????? ?????, -7/12 ?", ?????????????="Littelfuse, Inc.", ???????=???????
X1: library part x0001, Contact_1=VBUS, Contact_2=D-, Contact_3=D+, Contact_4=NC, Contact_5=GND, HelpURL=https://www.te.com/global-en/product-2108877-1.html, ID=x0001, ????????????=2108877-1, ????????="USB 2.0 Micro USB Type B IP68 ?????? ?????? ????", ?????????????="TE Connectivity", ???????=????????
X2: library part x0003, Contact_1=A, Contact_2=NC, Contact_3=B, Contact_4=NC, Contact_5=GND, Contact_6=NC, HelpURL=http://www.connfly.com/productshow.aspx?id=118, ID=x0003, ????????????=DS1021-2*3SF11, ????????="PLS 3x2 pin 2,54 ?? ??????", ?????????????="Connfly Electronic Co. LTD", ???????=???????
S1 S2: HelpURL=http://www.klsele.com/admin/product_upload/20120515130956KLS7-TS6604.pdf, ID=sw0003, ????????=????????, ?????????? ?????????=4, ??????=6?6?3,5, ????????????=KLS7-TS6604-5.0-180-B, ????????="???????? ?????? ?????????????? ???????", ?????????????=KLS, ????????="?? ??????? (?????????)", ????????????? ????????="50 ???", ??????????? ?????????? ????? (???????), ????#="+70 °C", ??????????? ?????????? ????? (???????), ???#="-20 °C", ??? ????????="50 ?? @ 12 ?"

## Via types
v1: diameter 0.6/0.6/0.6/0.6 (per signal layer), hole 0.3, Top Layer to Bottom Layer, tented both sides, 65 vias
v2: diameter 0.6, hole 0.3, Top Layer to Bottom Layer, tented both sides, 17 vias

## Nets (pads, with @x,y where several pads share a name; then routed paths per layer and width w, separated by ;. In a path a pad name is that pad's centre, name@x,y a point inside that pad or via, vN(x,y) a via of type N, cw(c..) or ccw(c..) an arc to the next point about the centre after c; other vN are vias at no path point)
+5V: C3.1 C5.2 C7.2 C8.1 DD1.7 DD1.8 DD2.5 L1.2 R1.2 R4.2 R5.2 R7.2 S1.2 | length 96.3
  Top Layer w0.15: R7.2@71.225,70.025 78.725,70.025 81.3,72.6 81.3,73.05 ; L1.2@74.55,85.7 L1.2 74.525,88.675 78.9,93.05 R1.2 ; DD1.7@83.675,80 81.775,78.1 81.775,78.025 81.35,77.6 C5.2 81.275,76 C3.1 81.3,73.05 ; v2(84.525,77.6) v2@84.525,77.722 ; S1.2@91.525,73.35 90.175,73.35 ; R5.2@95.8,80.175 95.8,78.5 92.75,78.5 90.25,76 90.25,73.425 90.175,73.35 ; DD2.5 107.045,78.85 C8.1@108.975,78.85 ; C8.1 109.05,78.55 v2(110.35,78.55) ; 81.3,73.05 81.4,72.95 C7.2 89.275,73.35 90.175,73.35
  Top Layer w0.3: L1.2@74.55,85.7 v2(76.075,85.7) ; DD1.7@83.675,80 84.4,79.275 84.8,79.275 84.825,79.25 DD1.8 84.825,78.022 v2@84.525,77.722
  Bottom Layer w0.15: v2(76.075,85.7) 83.804,77.971 84.154,77.971 v2(84.525,77.6) 85.025,78.1 109.9,78.1 v2(110.35,78.55)
\R\S\T\: C6.1 DD1.9 R7.1 S2.1 | length 24.4
  Top Layer w0.15: S2.1@66.675,73.25 68.325,73.25 68.975,72.6 C6.1 69.125,71.575 R7.1@71.225,71.575 ; R7.1 v2(72.875,71.85) ; DD1.9 85.306,79.206 85.306,77.682 v2(85.388,77.6)
  Bottom Layer w0.15: v2(72.875,71.85) 72.925,71.8 79.45,71.8 85.25,77.6 v2(85.388,77.6)
\S\U\S\P\E\N\D\: DD1.11 R8.2 S1.1 | length 15.8
  Top Layer w0.15: v2(86.325,77.6) DD1.11 ; v2(87,68.5) 88.8,68.5 R8.2 90,68.4 90.45,68.85 S1.1@91.525,68.85
  Bottom Layer w0.15: v2(86.325,77.6) 86.325,69.175 v2(87,68.5)
CN_5V_IN: VD1.2 X1.1 | length 4.6
  Top Layer w0.15: VD1.2@59.995,83.7 VD1.2
  Top Layer w0.38: X1.1 VD1.2@59.995,83.7
CN_D_N: VD2.2 X1.2 | length 12.5
  Top Layer w0.15: X1.2@55.425,83.159 57.016,83.159 58.813,81.362 66.242,81.362 VD2.2@66.56,81.68
  Top Layer w0.381: VD2.2@66.56,81.68 VD2.2
CN_D_P: VD2.3 X1.3 | length 12.5
  Top Layer w0.15: X1.3@55.425,82.524 56.753,82.524 58.55,80.727 66.242,80.727 VD2.3@66.56,80.41
  Top Layer w0.381: VD2.3@66.56,80.41 VD2.3
CN_RS485_N: R9.2 X2.3 | length 10.2
  Top Layer w0.15: R9.2@114.06,80.385 114.235,80.385 114.283,80.433 118.175,80.433 118.771,81.028 122.346,81.028 X2.3@123.23,80.144
  Top Layer w0.381: R9.2 113.825,80.15 R9.2@114.06,80.385 ; X2.3 X2.3@123.23,80.144
CN_RS485_P: R10.2 X2.1 | length 10.2
  Top Layer w0.15: R10.2@114.06,81.115 114.235,81.115 114.283,81.068 117.912,81.068 118.507,81.663 122.277,81.663 X2.1
  Top Layer w0.381: R10.2 113.825,81.35 R10.2@114.06,81.115
GND: C1.2 C2.2 C3.2 C4.1 C5.1 C6.2 C7.1 C8.2 DD1.3 DD2.8 HL1.1 HL2.1 HL3.1 R6.1 R8.1 S2.2 VD2.4 VD2.5 VD3.3 X1.5 X1.TP1 X2.5 | length 0.9
  Top Layer w0.15: C1.2@76.925,74.2 C1.2 ; C3.2@79.875,76 C3.2
  other v1: 52.5,67.5 57.5,67.5 67.5,67.5 72.5,67.5 77.5,67.5 82.5,67.5 97.5,67.5 102.5,67.5 107.5,67.5 112.5,67.5 117.5,67.5 122.5,67.5 127.5,67.5 57.5,72.5 102.5,72.5 107.5,72.5 112.5,72.5 117.5,72.5 122.5,72.5 127.5,72.5 57.5,77.5 62.5,77.5 67.5,77.5 72.5,77.5 102.5,77.5 127.5,77.5 127.5,82.5 55,87.5 60,87.5 65,87.5 70,87.5 80,87.5 85,87.5 90,87.5 95,87.5 102.5,87.5 107.5,87.5 112.5,87.5 117.5,87.5 122.5,87.5 127.5,87.5 55,92.5 60,92.5 65,92.5 70,92.5 75,92.5 95,92.5 102.5,92.5 107.5,92.5 112.5,92.5 117.5,92.5 122.5,92.5 127.5,92.5 60,97.5 65,97.5 70,97.5 75,97.5 95,97.5 102.5,97.5 107.5,97.5 112.5,97.5 117.5,97.5 122.5,97.5 127.5,97.5 55,97.525
NetDD1_24: DD1.24 DD2.1 DD2.2 R6.2 | length 18.3
  Top Layer w0.15: DD1.24@86.875,84.125 86.875,84.525 87.2,84.85 97.65,84.85 99.5,83 R6.2 ; R6.2@99.55,83 R6.2@99.87,82.68 ; DD2.2 101.14,81.41 R6.2@99.87,82.68 ; DD2.1 R6.2@99.87,82.68
NetHL1_2: HL1.2 R1.1 | length 1.7
  Top Layer w0.15: R1.1 80.45,94.65 HL1.2
NetHL2_2: HL2.2 R2.2 | length 2
  Top Layer w0.15: HL2.2 89.425,93.05 R2.2
NetHL3_2: HL3.2 R3.2 | length 2
  Top Layer w0.15: HL3.2 84.75,92.775 R3.2
NetL1_1: L1.1 VD2.8 | length 3.8
  Top Layer w0.15: VD2.8@72.1,83.158 72.308,82.95 VD2.8 VD2.8@72.275,83.125
  Top Layer w0.3: VD2.8@72.1,83.158 72.1,85.1 72.675,85.675 L1.1@73.025,85.675
NetVD1_1: VD1.1 VD2.1 | length 4
  Top Layer w0.15: VD2.1@66.575,82.95 VD2.1
  Top Layer w0.38: VD1.1 66.03,83.495 VD2.1@66.575,82.95
RS485_N: DD2.6 R9.1 VD3.1 | length 12.6
  Top Layer w0.15: DD2.6@107.465,80.14 107.783,80.458 109.692,80.458 109.717,80.433 111.2,80.433 ; R9.1@112.04,80.385 111.865,80.385 111.817,80.433 111.2,80.433 ; VD3.1 112.4,78.125 111.2,79.325 111.2,80.433
  Top Layer w0.381: DD2.6 DD2.6@107.465,80.14 ; R9.1@112.04,80.385 112.275,80.15 R9.1
RS485_P: DD2.7 R10.1 VD3.2 | length 18.2
  Top Layer w0.15: DD2.7@107.465,81.41 107.783,81.093 109.955,81.093 109.98,81.068 110.899,81.068 ; v2(110.975,82.9) 110.975,81.144 110.899,81.068 ; R10.1@112.04,81.115 111.865,81.115 111.817,81.068 110.899,81.068 ; v2@114.775,76.25 VD3.2@116.655,76.25
  Top Layer w0.381: DD2.7 DD2.7@107.465,81.41 ; R10.1@112.04,81.115 112.275,81.35 R10.1 ; v2(114.75,76.275) v2@114.775,76.25 ; VD3.2@116.655,76.25 VD3.2
  Bottom Layer w0.15: v2(110.975,82.9) 111.65,82.225 112.827,82.225 113.05,82.002 113.05,77.975 v2(114.75,76.275)
RX: DD1.25 DD2.3 R2.1 R5.1 | length 31.7
  Top Layer w0.15: DD1.25@86.319,84.3 86.319,85.53 86.529,85.74 v2(86.529,87.004) 86.529,89.379 86.925,89.775 86.925,90.827 87.398,91.3 89.55,91.3 R2.1@91.125,92.875 ; R5.1@97.458,80.142 v2@99.258,80.142 ; v2@99.32,80.12 DD2.3@101.555,80.12
  Top Layer w0.381: R2.1@91.125,92.875 R2.1 ; R5.1 R5.1@97.458,80.142 ; v2@99.258,80.142 v2(99.3,80.1) v2@99.32,80.12 ; DD2.3@101.555,80.12 DD2.3
  Bottom Layer w0.15: v2@86.533,87 90.4,87 97.3,80.1 v2(99.3,80.1)
  Bottom Layer w0.381: v2(86.529,87.004) v2@86.533,87
TX: DD1.26 DD2.4 R3.1 R4.1 | length 30.4
  Top Layer w0.15: v2(85.8,87) 85.8,89.605 86.35,90.155 R3.1 ; DD1.26@85.813,83.837 v2@85.813,86.988 ; R4.1 v2(99.3,78.8) ; v2@99.335,78.835 DD2.4@101.54,78.835
  Top Layer w0.381: v2(85.8,87) v2@85.813,86.988 ; v2(99.3,78.8) v2@99.335,78.835 ; DD2.4@101.54,78.835 DD2.4
  Bottom Layer w0.15: v2@85.842,86.958 85.842,86.658 86.2,86.3 90.384,86.3 97.142,79.542 98.558,79.542 v2(99.3,78.8)
  Bottom Layer w0.381: v2(85.8,87) v2@85.842,86.958
USB_D_N: DD1.5 VD2.7 | length 13.9
  Top Layer w0.15: VD2.7@72.89,81.68 73.208,81.362 v2@76.45,81.362 ; v2@78.175,80.77 83.174,80.77 83.525,80.975 DD1.5@83.627,80.975
  Top Layer w0.381: VD2.7 VD2.7@72.89,81.68 ; v2(77.975,80.725) 78.017,80.767 78.172,80.767 v2@78.175,80.77
  Bottom Layer w0.15: v2@76.457,81.446 76.927,81.446 77.567,82.085 78.238,82.085 78.61,81.713 78.61,80.91 78.412,80.712 v2@78.001,80.712
  Bottom Layer w0.381: v2(76.45,81.452) v2@76.457,81.446 ; v2@77.994,80.706 v2@78.001,80.712
USB_D_P: DD1.4 VD2.6 | length 11.9
  Top Layer w0.15: VD2.6@72.89,80.41 73.208,80.727 v2(76.45,80.727) ; v2@78.175,81.405 82.914,81.405 83.059,81.55 DD1.4@83.75,81.55
  Top Layer w0.381: VD2.6 VD2.6@72.89,80.41 ; v2@78.034,81.45 v2(77.975,81.45) 78.017,81.408 78.172,81.408 v2@78.175,81.405
  Bottom Layer w0.15: v2@76.688,80.811 77.19,80.811 77.72,81.341 v2@77.806,81.341
  Bottom Layer w0.381: v2(76.45,80.727) 76.492,80.769 76.647,80.769 v2@76.688,80.811 ; v2@77.806,81.341 77.916,81.45 v2(77.975,81.45)
VCC: C1.1 C2.1 C4.2 DD1.6 | length 14
  Top Layer w0.15: C1.1 75.525,74 C4.2 C2.1 75.6,77.65 76.15,78.2 76.15,78.233 78.142,80.225 83.325,80.225 83.625,80.525 DD1.6
pads on no net: DD1.1 DD1.2 DD1.10 DD1.12 DD1.13 DD1.14 DD1.15 DD1.16 DD1.17 DD1.18 DD1.19 DD1.20 DD1.21 DD1.22 DD1.23 DD1.27 DD1.28 DD1.29 X1.4 X2.2 X2.4 X2.6

## Polygon pours and split planes (outlines as drawn)
GND on Top Layer "Top Layer-GND" (solid, pour order 84): 100.55,103.525
GND on Top Layer "Top Layer-GND" (solid, pour order 82): 50,99.9 49.95,99.85 49.95,65.75 127.975,65.75 127.9,65.825 127.9,100.025
GND on Top Layer "Top Layer-GND" (solid, pour order 80): 130.525,92.55
GND on Top Layer "Top Layer-GND" (solid, pour order 76): 72.5,58.35
GND on Top Layer "TOP Layer-GND" (solid, pour order 54): 95.425,62.15
GND on Top Layer "TOP Layer-GND" (solid, pour order 50): 93.625,60.475
GND on Top Layer "TOP Layer-GND" (solid, pour order 46): 89.1,57.325
GND on Top Layer "TOP Layer-GND" (solid, pour order 42): 104.6,58.9
GND on Top Layer "TOP Layer-GND" (solid, pour order 40): 108.175,58.3
GND on Top Layer "Top Layer-GND" (solid, pour order 18): 99.725,102.8
GND on Top Layer "Top Layer-GND" (solid, pour order 16): 99.725,102.8
GND on Top Layer "Top Layer-GND" (solid, pour order 12): 113.7,101.7
GND on Top Layer "Top Layer-GND" (solid, pour order 8): 90.7,102.375
GND on Top Layer "Top Layer-GND" (solid, pour order 4): 95.1,102.3
GND on Top Layer "Top Layer-GND 1" (solid, pour order 2): 102.725,60.15
no net on Top Courtyard (solid): 50.1,99.975
GND on Bottom Layer "Bottom Layer-GND" (solid, pour order 72): 100.45,60.5
GND on Bottom Layer "Bottom Layer-GND" (solid, pour order 70): 49.925,100 128.125,100 128.125,65.525 128,65.4 127.725,65.675 49.925,65.675
GND on Bottom Layer "Bottom Layer-GND" (solid, pour order 24): 106.95,101.25
GND on Bottom Layer "Bottom Layer-GND" (solid, pour order 22): 106.95,101.25
GND on Signal Layer 1 "signal Layer1-GND" (solid, pour order 60): 86.55,56.15
GND on Signal Layer 1 "signal Layer1-GND" (solid, pour order 58): 86.55,56.15
GND on Signal Layer 1 "signal Layer1-GND" (solid, pour order 56): 49.825,100.1 50.075,99.85 127.925,99.85 127.925,65.775 128,65.7 127.9,65.6 50.15,65.6
no net on Signal Layer 1 "Signal Layer1-GND" (solid, pour order 32): 102.3,100.875
no net on Signal Layer 1 "Signal Layer1-GND" (solid, pour order 30): 102.3,100.875
no net on Signal Layer 1 "Signal Layer1-GND" (solid, pour order 28): 102.3,100.875
GND on Signal Layer 2 "signal Layer2-GND" (solid, pour order 68): 92.875,61.925
GND on Signal Layer 2 "signal Layer2-GND" (solid, pour order 66): 92.8,62.725
GND on Signal Layer 2 "signal Layer2-GND" (solid, pour order 64): 92.3,63.95
GND on Signal Layer 2 "signal Layer2-GND" (solid, pour order 62): 49.925,100 128.125,100 128.075,99.95 128.075,65.4 50.2,65.4 50,65.6
GND on Signal Layer 2 "Signal Layer2-GND" (solid, pour order 36): 97.075,102.525

## Other copper
Top Layer:

## Silkscreen, mask and mechanical layers (free items; w line width, h text height)
Top Overlay:
  text "RX" at 88.6,98 h2
  text "PWR" at 78.05,97.857 h2
  text "TX" at 83.55,97.875 h2
  text "USB-RS485" at 113.025,94.675 h3
  text "A" at 119.425,81.925 h2
  text "B" at 119.45,79.575 h2
  text "Suspend" at 91.95,75.1 h2
  text "Reset" at 60.3,74.9 h2
  text "GND" at 120.975,74.7 h2
  text ".designation" at 50.075,65.8 h2
Bottom Overlay:
  text ".pcb_dec_number" at 66.2,65.675 h2
Board:
  lines w0.1: 128.025,65.55 128.075,100 50,100 49.95,65.55 128.05,65.55
Assembly Notes (Mech5):
  text "'.title'" at 49.825,63.575 h2
  text "'.project'_'.pcb_dec_number'['.Pcb_File_Name_No_Path']" at 48.925,61.475 h2